# Altium PCB PCB_12to24.PcbDoc
Units mil, origin at the board's own origin, x right, y up, seen from the top; angles counter-clockwise.
Board outline 1135 x 700 mil, 2 copper layers (Top Layer, Bottom Layer); 12 components, 9 nets, 40 pads, 0 vias.
Unrouted connection lines stored in the file: 3.
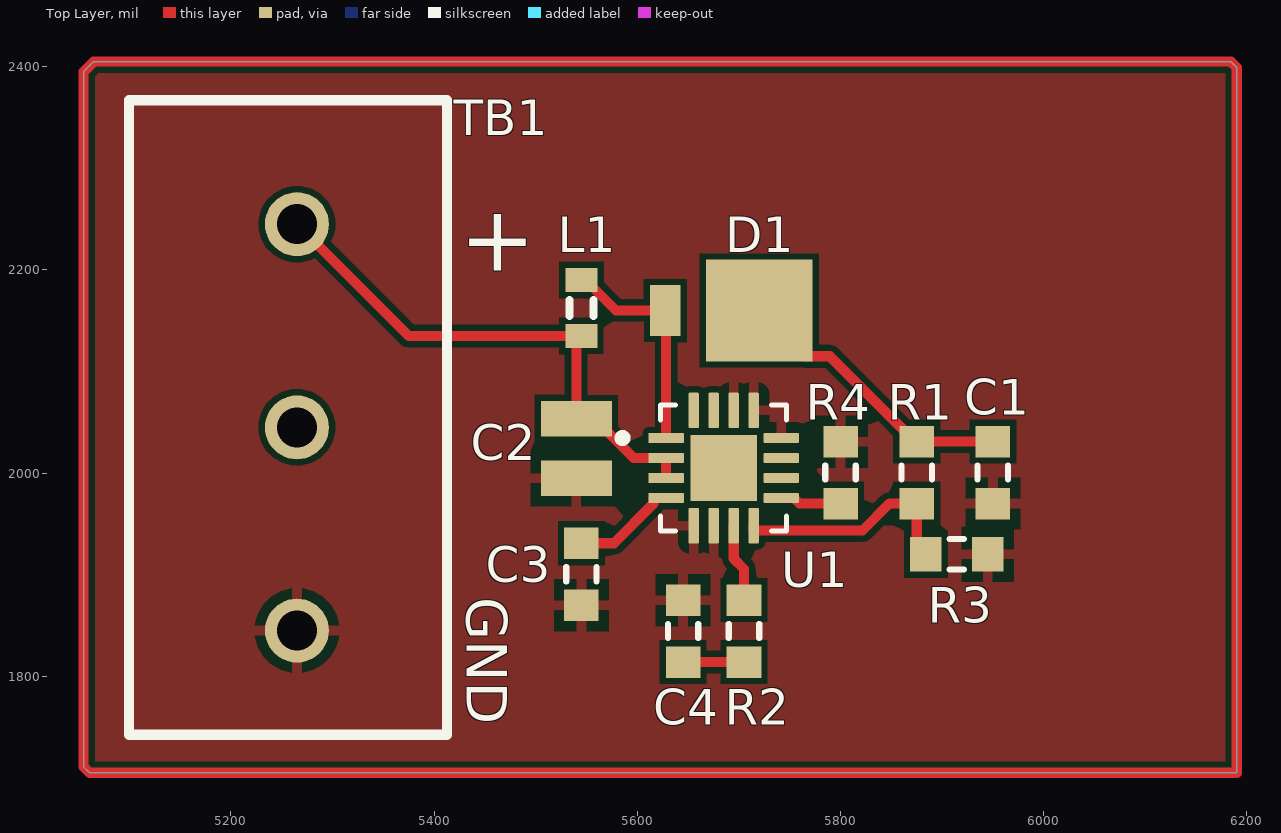
[diagram p0: Top Layer view]
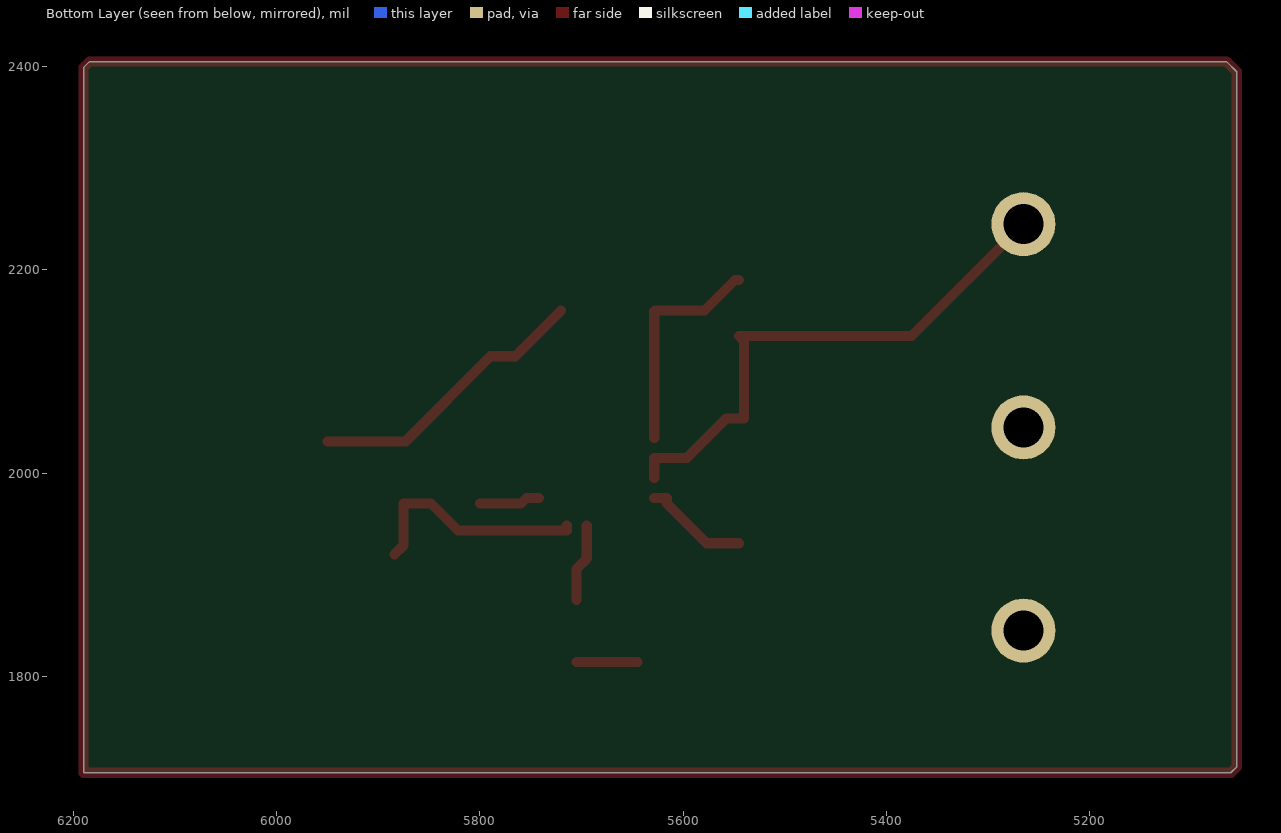
[diagram p1: Bottom Layer view, seen from below]
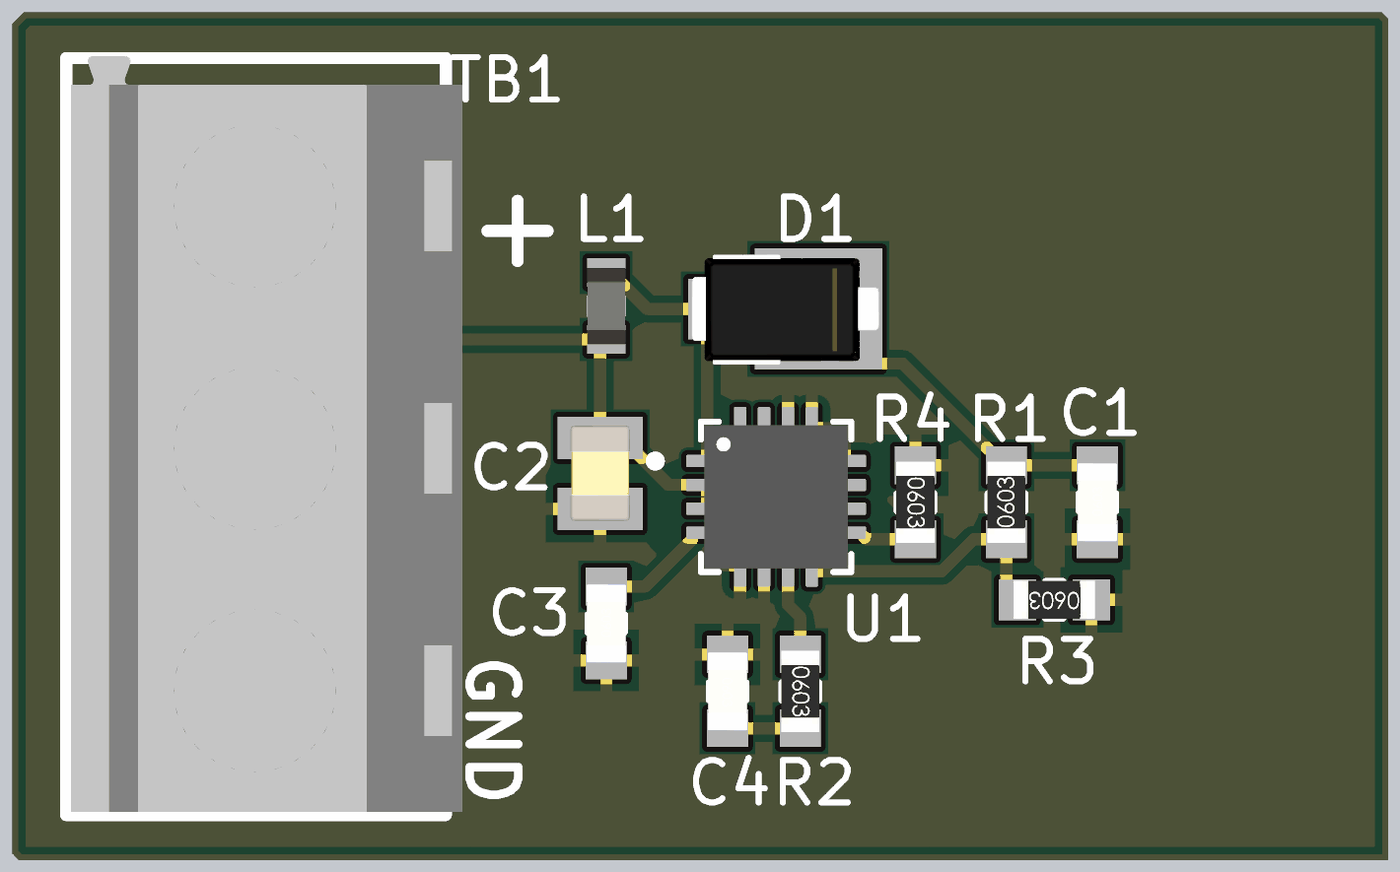
[diagram p2: 3D render of the assembled board from above, using the file's embedded part models]

## Layer stack, top to bottom
Top Solder: solder mask 0.4, Solder Resist, Dk 3.5
Top Layer: signal copper 1.4
Dielectric 1: dielectric 12.6, FR-4, Dk 4.8
Bottom Layer: signal copper 1.4
Bottom Solder: solder mask 0.4, Solder Resist, Dk 3.5

## Board outline
5055,1710.86 5060.86,1705 6190,1705 6190,2399.14 6184.14,2405 5065,2405 5055,2395

## Design rules (kind name [scope] priority, off if disabled: settings)
Clearance [All] p1: gap=6 ignorepadtopadclearanceinfootprint=FALSE
HoleSize [All] p1: absolutevalues=TRUE maxlimit=500 minlimit=12 maxpercent=80.000 minpercent=20.000
HoleToHoleClearance [All] p1: gap=14 allowstackedmicrovias=TRUE
MinimumAnnularRing [All] p1: minimumring=3
MinimumSolderMaskSliver [All] p1: minsoldermaskwidth=4
PolygonConnect [All] p1: connectstyle=Relief reliefconductorwidth=10 reliefentries=4 polygonreliefangle="90 Angle" airgapwidth=10
RoutingVias [All] p1: holewidth=12 width=50 viastyle="Through Hole" minholewidth=12 minwidth=50 maxholewidth=100 maxwidth=50
SilkToSilkClearance [All] p1: silktosilkclearance=2
SilkToSolderMaskClearance [IsPad] p1: minsilkscreentomaskgap=0.1 clearancetoexposedcopper=TRUE
SolderMaskExpansion [All] p1: expansion=4 istentingtop=FALSE
SupplyNets "Schematic Supply Nets_2" [InNet('24V')] p1: voltage=0.000
SupplyNets "Schematic Supply Nets_1" [InNet('12V')] p2: voltage=0.000
SupplyNets "Schematic Supply Nets" [InNet('GND')] p3: voltage=0.000
Width Width_12V [InNetClass('12VCLASS')] p1: maxlimit=60 minlimit=60 preferedwidth=60
Width [All] p2: maxlimit=10 minlimit=10 preferedwidth=10
25 further rules are at their usual default settings.

## Classes and differential pairs
component class 12_to_24V_boost_tps5534: C1 C2 C3 C4 D1 L1 R1 R2 R4 TB1 U1

## Components (designator, comment, footprint, x,y, rotation, side; value= is the part's Value field where it differs from the comment)
C1 "10u" CAP_0603 5950,2000.5 r90 top
C2 "33u" CAP_0805 5540,1995 r90 top
C3 "22nF" CAP_0603 5545,1900.5 r90 top value=22n
C4 "22nF" CAP_0603 5645,1844.5 r270 top value=22n
D1 "SS3P4-M3/84A" "DO-220AA(POWER DIODE)" 5673.72,2160 r180 top
L1 "IND 15UH 2MA 1.5 OHM" L_0603 5545,2162.44 r90 top value=15u
R1 "187K" RES_0603 5875,2000.5 r90 top
R2 "1K" RES_0603 5705,1844.5 r270 top
R3 "10K" RES_0603 5914.5,1920 r180 top
R4 "100K" RES_0603 5800,2000.5 r270 top
TB1 "TB_3x1_5.08mm" TB_3X1_5.08mm 5265,2045 r180 top
U1 "TPS55340RTER" QFN50P300X300X80-17N 5685,2005 r0 top

## Footprints (in the part's own frame and the unit in brackets; to place one, negate y for a bottom-side part, rotate by r counter-clockwise, add the part's x,y. Pads: shape width x height; smd on the part's side, far side on the other; paste and mask are expansions set on the pad)
CAP_0603 [mil]
  rect 31x34 smd: 1(-30.5,0) 2(30.5,0)
  silkscreen extent -7,-15 7,15, body extent -32,-16 32,16
CAP_0805 [mil]
  rect 35x70 smd: 1(0,0) 2(58.66,0)
  body extent -10,-25 69,25, height 49
"DO-220AA(POWER DIODE)" [mil]
  rect 30x50 smd: 1(46.28,0)
  rect 105.12x100 smd: 2(-46.28,0)
  body extent -96,-45 58,46, height 45
L_0603 [mm]
  rect 0.6x0.8 smd: 1(-0.7,0) 2(0.7,0)
  silkscreen extent -0.2,-0.3 0.2,0.3, body extent -0.8,-0.4 0.8,0.4, height 0.45
QFN50P300X300X80-17N [mm]
  rrect25% 0.89x0.26 smd: 1(-1.44,0.75) 2(-1.44,0.25) 3(-1.44,-0.25) 4(-1.44,-0.75) 9(1.44,-0.75) 10(1.44,-0.25) 11(1.44,0.25) 12(1.44,0.75)
  rrect25% 0.26x0.89 smd: 5(-0.75,-1.44) 6(-0.25,-1.44) 7(0.25,-1.44) 8(0.75,-1.44) 13(0.75,1.44) 14(0.25,1.44) 15(-0.25,1.44) 16(-0.75,1.44)
  rect 1.66x1.66 smd paste-0.31: 17(0,0)
  silkscreen extent -2.63,-1.58 1.58,1.58, body extent -1.5,-1.5 1.5,1.5, height 0.8
RES_0603 [mil]
  rect 31x34 smd: 1(-30.5,0) 2(30.5,0)
  silkscreen extent -7,-15 7,15, body extent -33,-16 33,16
TB_3X1_5.08mm [mm]
  round 1.6 hole 1: 1(0,5.08) 2(0,0) 3(0,-5.08)
  silkscreen extent -3.75,-8.18 4.2,7.68, body extent -4.1,-8.22 4.1,7.62, height 10.05

## Part data
C1: library part CAP_10u_0603, "CAP CER 10UF 10V X5R 0603", Manufacturer="Samsung Electro-Mechanics", Manufacturer Part Number 1=CL10A106KP8NNNC, Supplier Part Number 1=1276-1192-1-ND, ComponentLink1Description="New link", ComponentLink1URL=https://www.digikey.com/en/products/detail/samsung-electro-mechanics/CL10A106KP8NNNC/3886850, Supplier 1=Digikey
C2: library part CAP_33u_0805, "CAP CER 33UF 6.3V X5R 0805", Manufacturer="TDK Corporation", Manufacturer Part Number 1=C2012X5R0J336M125AC, Supplier Part Number 1=445-5986-1-ND, ComponentLink1Description="New link", ComponentLink1URL=https://www.digikey.com/en/products/detail/samsung-electro-mechanics/CL10A106KP8NNNC/3886850, Supplier 1=Digikey
C3 C4: library part CAP_22nF_0603, "CAP CER 0.027UF 25V X7R 0603", Manufacturer="Cal-Chip Electronics, Inc.", Manufacturer Part Number 1=GMC10X7R273J25NT, Supplier Part Number 1=2571-GMC10X7R273J25NTTR-ND, ComponentLink1Description="New link", ComponentLink1URL=https://www.digikey.com/en/products/detail/cal-chip-electronics-inc/GMC10X7R273J25NT/13908236, Supplier 1=Digikey
D1: "DIODE SCHOTTKY 40V 3A DO220AA", Manufacturer="Vishay General Semiconductor - Diodes Division", Supplier Part Number 1=SS3P4-M3/84AGICT-ND, ComponentLink1Description="New link", ComponentLink1URL=https://www.digikey.com/en/products/detail/vishay-general-semiconductor-diodes-division/SS3P4-M3-84A/1147819?s=N4IgTCBcDaIMpwMwAUAsBaAsog9ADlQEEQBdAXyA, Manufacturer Part Number 1=SS3P4-M3/84A, Supplier 1=Digikey
L1: library part L_15uH_0603, "FIXED IND 15UH 2MA 1.5 OHM SMD", Manufacturer="TDK Corporation", Manufacturer Part Number 1=MLF1608C150KTA00, Supplier Part Number 1=445-1027-1-ND, ComponentLink1Description="New link", ComponentLink1URL=https://www.digikey.com/en/products/detail/tdk-corporation/MLF1608C150KTA00/504196, Supplier 1=Digi-key
R1: library part RES_187K_0603, "RES SMD 187K OHM 1% 1/10W 0603", Manufacturer="Panasonic Electronic Components", Manufacturer Part Number 1=ERJ-3EKF1873V, Supplier Part Number 1=P187KHTR-ND, ComponentLink1Description="New link", ComponentLink1URL=https://www.digikey.com/en/products/detail/panasonic-electronic-components/ERJ-3EKF1873V/196173, Supplier 1=Digi-key
R2: library part RES_1K_0603, "RES 1K OHM 1% 1/10W 0603", Manufacturer="Stackpole Electronics Inc", Manufacturer Part Number 1=RMCF0603FT1K00, Supplier Part Number 1=RMCF0603FT1K00CT-ND, ComponentLink1Description="New link", ComponentLink1URL=https://www.digikey.com/en/products/detail/stackpole-electronics-inc/RMCF0603FT1K00/1761077, Supplier 1=Digi-key
R3: library part RES_10K_0603, "RES 10K OHM 1% 1/10W 0603", Manufacturer="Stackpole Electronics Inc", Manufacturer Part Number 1=RMCF0603FT100R, Supplier Part Number 1=RMCF0603FT10K0CT-ND, ComponentLink1Description="New link", ComponentLink1URL=https://www.digikey.com/en/products/detail/stackpole-electronics-inc/RMCF0603FT10K0/1761235, Supplier 1=Digi-key
R4: library part RES_100K_0603, "Fixed Resistor, Metal Glaze/thick Film, 0.1W, 100000ohm, 50V, 5% +/-Tol, 200ppm/Cel, Surface Mount, 0603", Case/Package=0603, Manufacturer="Stackpole Electronics Inc", Manufacturer Part Number 1=RMCF0603FT100R, Supplier Part Number 1=RMCF0603FT10K0CT-ND, ComponentLink1Description="New link", ComponentLink1URL=https://www.digikey.com/en/products/detail/stackpole-electronics-inc/RMCF0603FT10K0/1761235, Supplier 1=Digi-key
TB1: "TERM BLK 3P SIDE ENT 5.08MM PCB", Manufacturer="On Shore Technology Inc.", Manufacturer Part Number 1=OSTTC032162, Supplier Part Number 1=ED2610-ND, ComponentLink1Description="New link", ComponentLink1URL=https://www.digikey.com/en/products/detail/on-shore-technology-inc/OSTTC032162/614559, Supplier 1=Digi-key
U1: "IC REG BOOST ADJ 5.25A 16WQFN", Manufacturer="Texas Instruments", Supplier Part Number 1=296-37677-2-ND, ComponentLink1Description="New link", ComponentLink1URL=https://www.digikey.com/en/products/detail/texas-instruments/TPS55340RTER/3503781?s=N4IgTCBcDaIC4AcDOBWFBmALABgE5wFNcQBdAXyA, Manufacturer Part Number=TPS55340RTER, Supplier 1=Digi-key

## Nets (pads, with @x,y where several pads share a name; then routed paths per layer and width w, separated by ;. In a path a pad name is that pad's centre, name@x,y a point inside that pad or via, vN(x,y) a via of type N, cw(c..) or ccw(c..) an arc to the next point about the centre after c; other vN are vias at no path point)
12V: C2.2 L1.1 TB1.3 U1.2 U1.3 | length 533
  Top Layer w10: TB1.3 5375.12,2134.88 L1.1 5540,2129.88 C2.2 5557.5,2053.66 5596.2,2014.96 5628.19,2014.96 U1.2 U1.3
24V: C1.2 D1.2 R1.2 | length 283.4
  Top Layer w10: D1.2 5765,2115 5789.5,2115 5873.5,2031 R1.2 C1.2
GND: C1.1 C2.1 C3.1 C4.1 R3.1 R4.1 TB1.1 U1.5 U1.6 U1.10 U1.11 U1.12 U1.13 U1.14 U1.17
NetC3_2: C3.2 U1.4 | length 105
  Top Layer w10: C3.2 5577,1931 5615.79,1969.79 5615.79,1975.35 5615.91,1975.47 U1.4
NetC4_2: C4.2 R2.2 | length 60
  Top Layer w10: C4.2 R2.2
NetD1_1: D1.1 L1.2 U1.1 | length 220.7
  Top Layer w10: L1.2 5548.94,2190 5578.94,2160 D1.1 5628.31,2159.13 U1.1
NetR1_1: R1.1 R3.2 U1.8 | length 229.9
  Top Layer w10: U1.8 5714.53,1943.62 5714.65,1943.5 5821.56,1943.5 5848.06,1970 R1.1 5875,1929 R3.2
NetR2_1: R2.1 U1.7 | length 77.5
  Top Layer w10: U1.7 5694.84,1915.78 5705,1905.62 R2.1
NetR4_2: R4.2 U1.9 | length 60.6
  Top Layer w10: U1.9 5754.09,1975.47 5759.57,1970 R4.2
pads on no net: TB1.2 U1.15 U1.16
copper on no net: | length 3657.3
  Top Layer w10: 5055,1710.86 5055,2395 5065,2405 6184.14,2405 6190,2399.14 6190,1730 6190,1705 5060.86,1705 5055,1710.86

## Polygon pours and split planes (outlines as drawn)
GND on Top Layer "GND_L01_P000" (solid, pour order 0): 5037,2412.5 5039.07,2414.57 6200.07,2414.57 6200.07,1694.93 6164.07,1694.93 5039.07,1694.93 5032,2137.5 5032,2152.5

## Silkscreen, mask and mechanical layers (free items; w line width, h text height)
Top Overlay:
  text "+" at 5415,2625 h60
  text "+" at 5425,2199.17 h65
  text "GND" at 5432,1878 h40 r270